# EAGLE board BEP32_6panel_Seed_wMilling (EAGLE 6.5.0), part 1 of 5
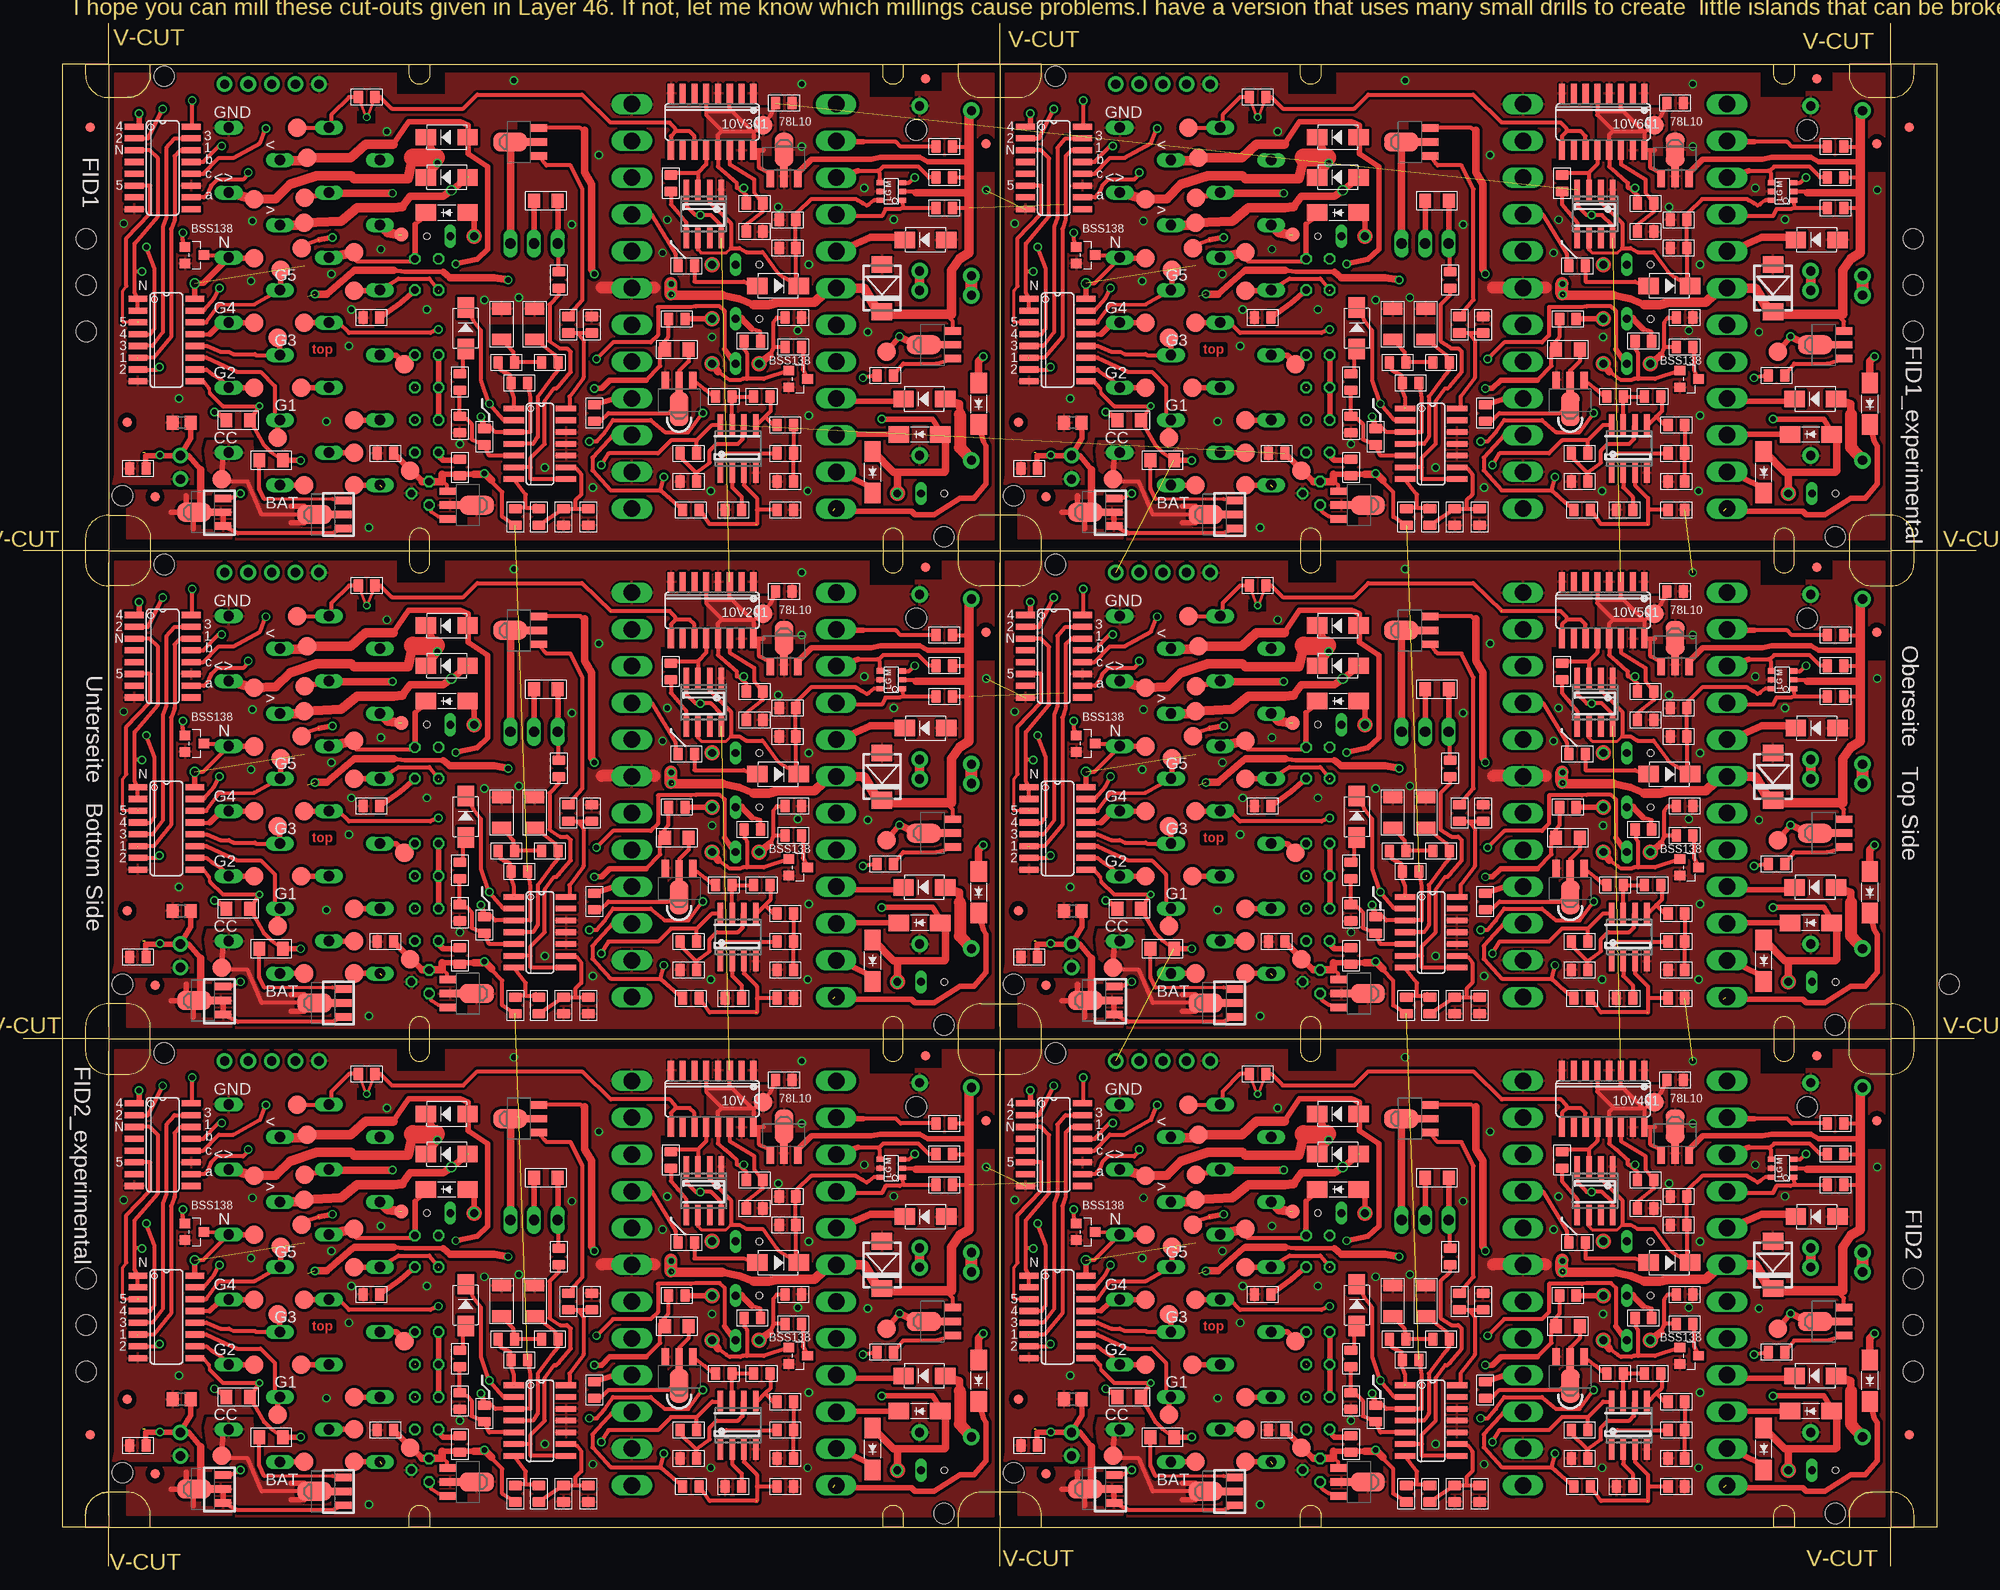
[diagram p0: board, top side]
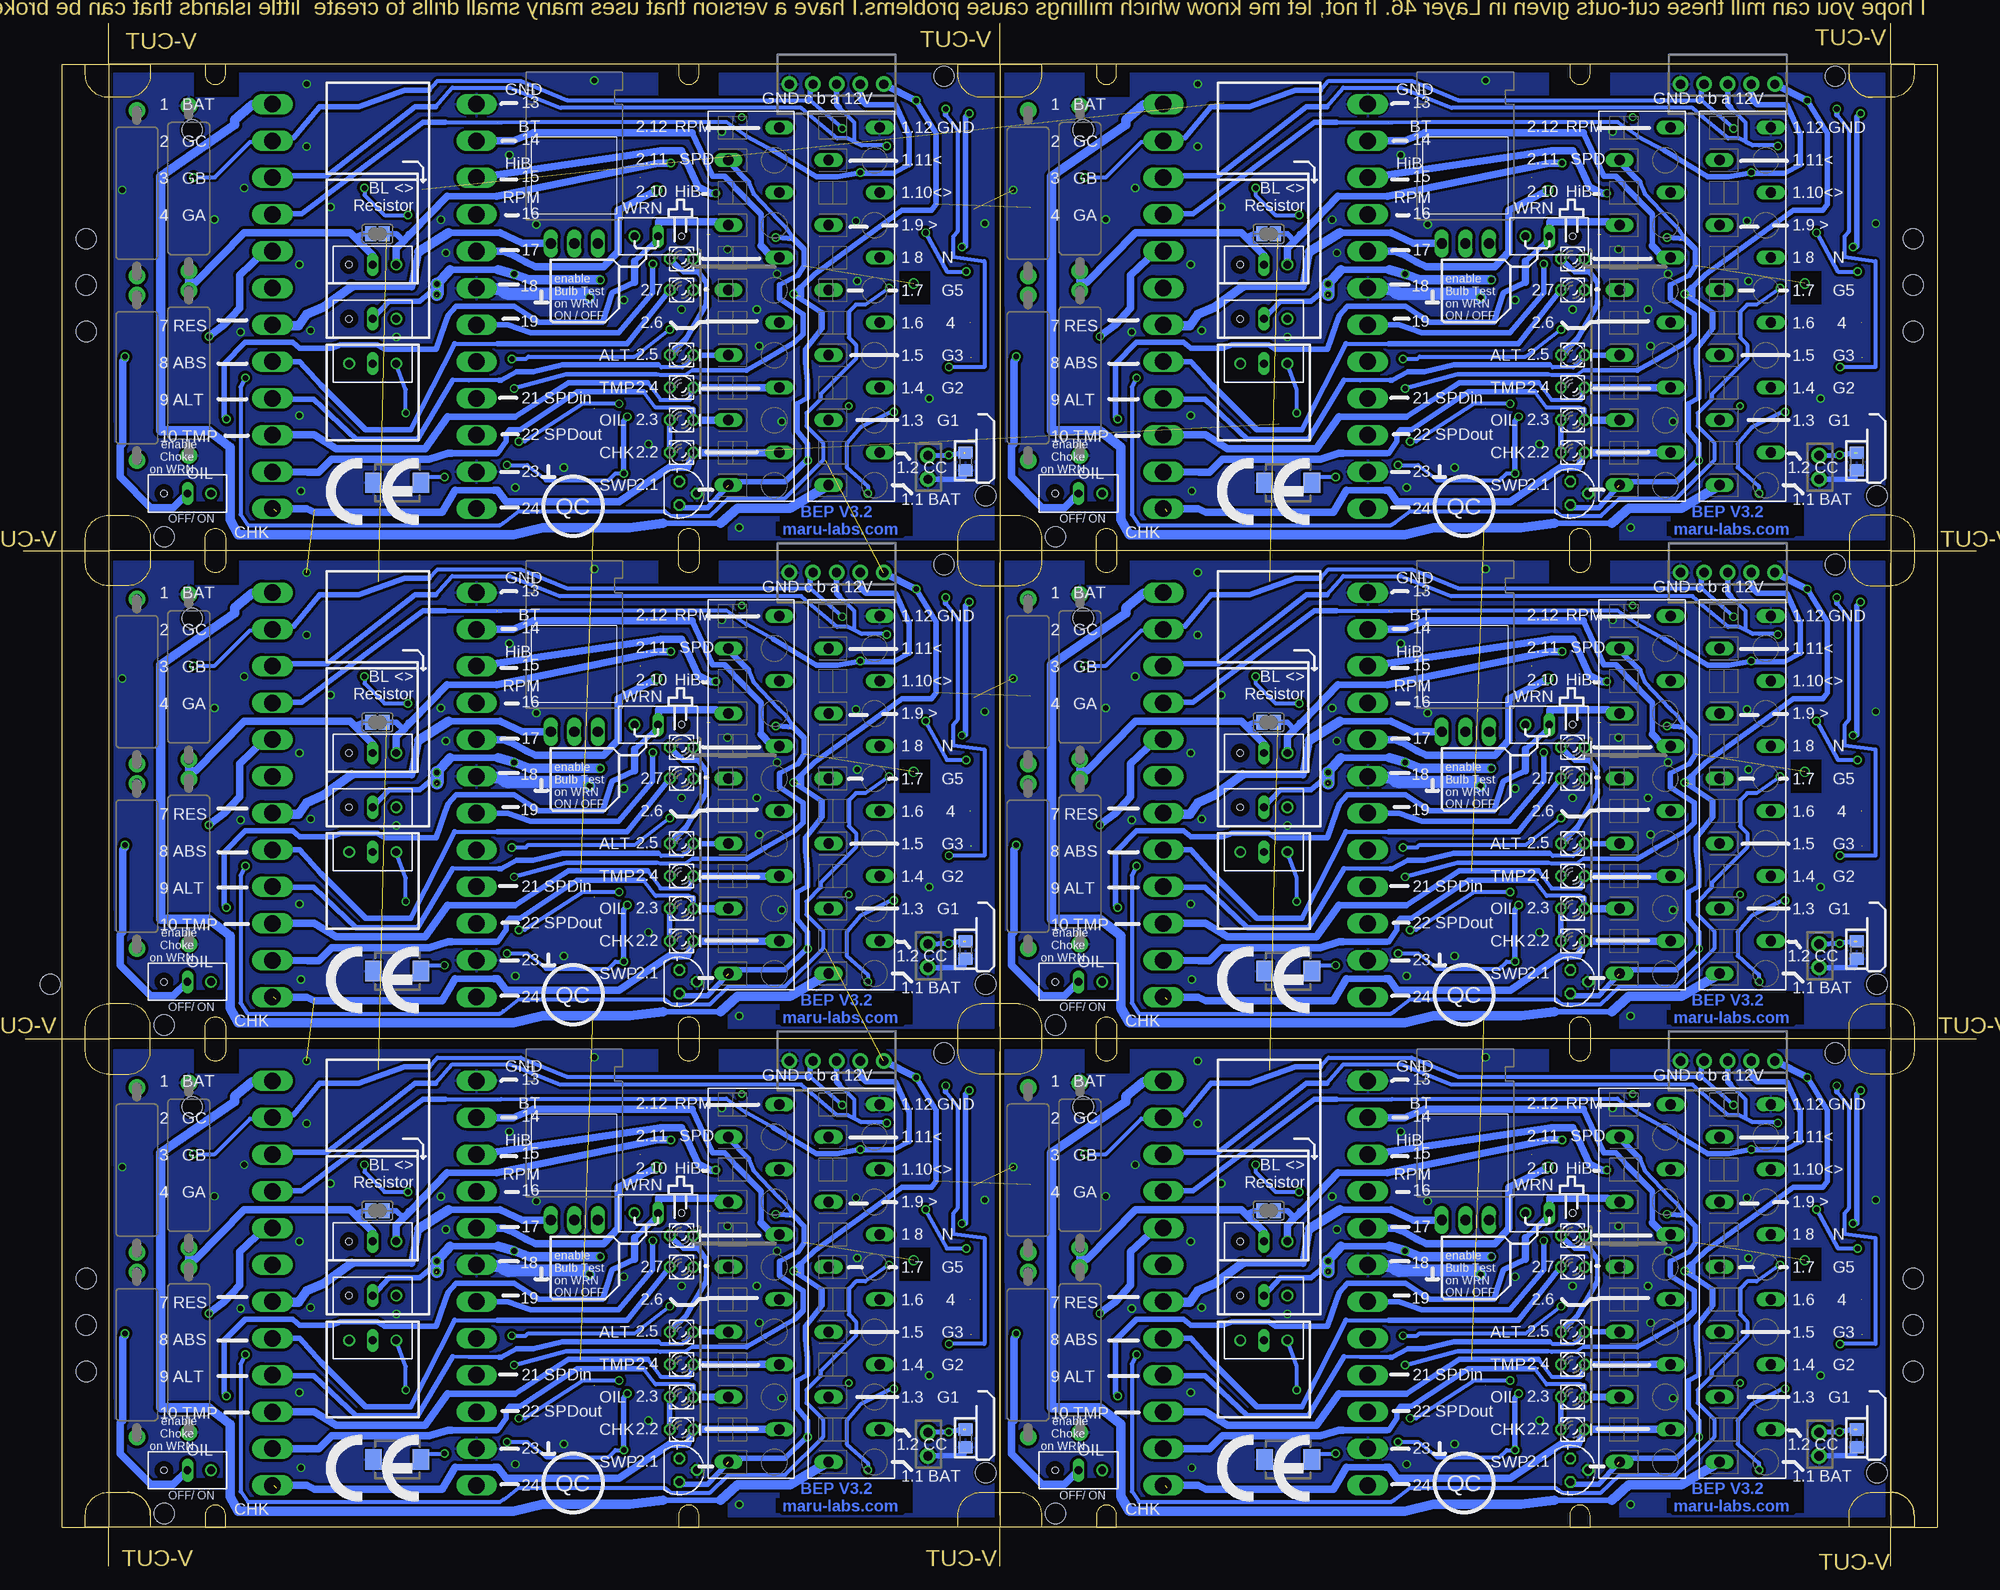
[diagram p1: board, bottom side, seen from below]

Size 210.4 x 166.2 mm. Coordinates in mm from the lower left corner, seen from the top.
Outline: 45 segments
Copper layers (1*16): Top 0.035mm / dielectric 1.5mm / Bottom 0.035mm
Design rules "Vorlage BEP3 und hoeher multi-cb_035um-cu": minimum track width 6mil, minimum drill 12mil, track to track 12mil, track to pad 12mil, pad to pad 6mil, via to via 6mil, smd to smd 6mil, copper to edge 10mil, drill to drill 8mil, minimum pad ring 8mil, minimum via ring 6mil, stop-mask expansion 3mil, vias tented up to drill 0mil, thermal gap 8mil
Holes 2.18 mm at 10.7,10.1 96.2,49.5 10.7,62.7 96.2,102.1 10.7,115.3 96.2,154.7 106.7,10.1 192.2,49.5 106.7,62.7 192.2,102.1 106.7,115.3 192.2,154.7 195.2,5.7 111.2,55.3 99.2,5.7 15.2,55.3 99.2,58.3 195.2,58.3 111.2,107.9 15.2,107.9 99.2,110.9 15.2,160.5 111.2,160.5 195.2,110.9 6.8,143 6.8,21 6.8,26 6.8,138 207.5,62.7 203.6,143 203.6,21 203.6,26 203.6,138 6.8,31 6.8,133 203.6,133 203.6,31
tRestrict: area 50.2,25.2 to 56.7,28.5; area 36,50.2 to 37.9,51.5; area 67.6,20.8 to 69.4,22.8; area 53.3,46.1 to 54.7,50.4; area 46.5,6.9 to 47.8,11.4; area 47.8,10.1 to 50.5,11.3; area 19.2,6.6 to 20.6,10.1; area 79.5,45.4 to 84.2,46.7; area 97.6,26.6 to 99.2,27.8; area 90.3,42.2 to 91.4,42.4; area 102.7,45 to 104.6,47.2; area 95.6,53.7 to 98.9,56.4; 78 more areas
bRestrict: area 18.6,5.8 to 28.8,9.3; area 28.7,5.8 to 33.3,7.3; area 38.5,5.1 to 45,7.3; area 39.5,53.3 to 46,55.7; area 90.8,5.7 to 96.8,9.5; area 16.7,30.7 to 20,34.3; area 91.2,53.1 to 96,56.1; area 18.6,58.4 to 28.8,62; area 28.7,58.4 to 33.3,59.9; area 38.5,57.7 to 45,59.9; area 39.5,105.9 to 46,108.3; area 90.8,58.3 to 96.8,62.1; 30 more areas
Milling: 180 lines

## Footprints (pad centres in the part's own frame; a part is rotated, then mirrored left to right if it is on the bottom)
12-PIN = drill 1.118 long: 1 19.25,-2.45; 2 15.75,3.05; 3 12.25,-2.45; 4 8.75,3.05; 5 5.25,-2.45; 6 1.75,3.05; 7 -1.75,-2.45; 8 -5.25,3.05; 9 -8.75,-2.45; 10 -12.25,3.05; 11 -15.75,-2.45; 12 -19.25,3.05
B2.0 = smd 2 x 2: TP 0,0
C0805 = smd 1.397 x 1.016: 1 0,0.889; 2 0,-0.889
C1206 = smd 1.27 x 2.032: 1 -1.651,0; 2 1.651,0
DO214AA = smd 1.8 x 2.2: A 2.55,0; C -2.55,0
DO-214AC = smd 2.2 x 1.77: 1 -2.242,0; 2 2.242,0
DO214AA_BI = smd 1.8 x 2.2: A 2.45,0; C -2.65,0
DO-214AC_SLIM = smd 2.2 x 1.77: 1 -2.242,0; 2 2.242,0
FIDUCIAL_1MM = smd 1 x 1: 1 0,0
FIDUCIAL_1MM_WITH_SOLDERMASK = smd 1 x 1: 1 0,0
SO08 = smd 0.6 x 2.2: 1 -1.905,-2.6; 2 -0.635,-2.6; 3 0.635,-2.6; 4 1.905,-2.6; 5 1.905,2.6; 6 0.635,2.6; 7 -0.635,2.6; 8 -1.905,2.6
SOT89_ROUND = smd 0.8 x 1.8: 1 -1.499,-2.181; 3 1.499,-2.181 | smd 0.8 x 2.3: 2 0,-1.927 | smd 2.032 x 3.65: 2@1 0,0.94
78LXX = drill 0.813 octagon: GND 0,1.905; IN 1.27,0; OUT -1.27,0
SO16 = smd 0.66 x 2.032: 1 -4.445,-3.073; 2 -3.175,-3.073; 3 -1.905,-3.073; 4 -0.635,-3.073; 5 0.635,-3.073; 6 1.905,-3.073; 7 3.175,-3.073; 8 4.445,-3.073; 9 4.445,3.073; 10 3.175,3.073; 11 1.905,3.073; 12 0.635,3.073; 13 -0.635,3.073; 14 -1.905,3.073; 15 -3.175,3.073; 16 -4.445,3.073
SOT457R_PHILIPS = smd 0.55 x 0.8: 1 -0.95,-1.2; 2 0,-1.2; 3 0.95,-1.2; 4 0.95,1.2; 5 0,1.2; 6 -0.95,1.2
SO14 = smd 0.6 x 2.2: 1 -3.81,-2.8; 2 -2.54,-2.8; 3 -1.27,-2.8; 4 0,-2.8; 5 1.27,-2.8; 6 2.54,-2.8; 7 3.81,-2.8; 8 3.81,2.8; 9 2.54,2.8; 10 1.27,2.8; 11 0,2.8; 12 -1.27,2.8; 13 -2.54,2.8; 14 -3.81,2.8
TO220H_NOHOLE = drill 1.118 long: 1 -2.54,-10.16; 2 0,-10.16; 3 2.54,-10.16
JP2_SMALLPADS = drill 0.85: 1 -2.54,0 | drill 0.85 long: 2 0,0 | hole 0.7: 2.54,0
JP2_ORIG_SMALLPADS = drill 0.85: 1 -2.54,0; 3 2.54,0 | drill 0.85 long: 2 0,0
LD260 = drill 0.813 octagon: A -1.27,0; K 1.27,0
SOT89 = smd 0.8 x 1.8: 1 -1.499,-2.181; 3 1.499,-2.181 | smd 0.8 x 2.3: 2 0,-1.927 | smd 2.032 x 3.65: 2@1 0,0.94
SOT-23 = smd 1.016 x 1.143: 1 -0.889,-1.016; 2 0.889,-1.016; 3 0,1.016
R0805 = smd 1.397 x 1.016: 1 0,0.889; 2 0,-0.889
R1206 = smd 1.27 x 1.524: 1 -1.27,0; 2 1.27,0
R0805' = smd 1.3 x 1.5: 1 -0.95,0; 2 0.95,0
V235/17_1MM = drill 1 pad 1.778: 1 -8.89,0; 2 8.89,0
SJ = smd 1.2 x 1.6: 1 -0.725,0; 2 0.725,0
B1,27 = smd 1.5 x 1.5: TP 0,0
24-PIN_V2 = drill 1.778 long: 1 -21.78,-11; 2 -17.82,-11; 3 -13.86,-11; 4 -9.9,-11; 5 -5.94,-11; 6 -1.98,-11; 7 1.98,-11; 8 5.94,-11; 9 9.9,-11; 10 13.86,-11; 11 17.82,-11; 12 21.78,-11; 13 -21.78,11; 14 -17.82,11; 15 -13.86,11; 16 -9.9,11; 17 -5.94,11; 18 -1.98,11; 19 1.98,11; 20 5.94,11; 21 9.9,11; 22 13.86,11; 23 17.82,11; 24 21.78,11
22-23-2021 = drill 1 pad 1.676: 1 -1.27,0; 2 1.27,0
22-23-2051 = drill 1 pad 1.676: 1 -5.08,0; 2 -2.54,0; 3 0,0; 4 2.54,0; 5 5.08,0

## Placement (x,y rotation side)
1  [12-PIN]  25.19,30.5 270 bottom
2  [12-PIN]  35.98,30.5 270 bottom
3  [12-PIN]  25.19,83.1 270 bottom
4  [12-PIN]  35.98,83.1 270 bottom
5  [12-PIN]  25.19,135.7 270 bottom
6  [12-PIN]  35.98,135.7 270 bottom
6V  TPSB2.0  [B2.0]  41.7,12.78 0 top
6V201  TPSB2.0  [B2.0]  41.7,65.38 0 top
6V301  TPSB2.0  [B2.0]  41.7,117.98 0 top
6V401  TPSB2.0  [B2.0]  137.7,12.78 0 top
6V501  TPSB2.0  [B2.0]  137.7,65.38 0 top
6V601  TPSB2.0  [B2.0]  137.7,117.98 0 top
10V  TPSB2.0  [B2.0]  79.7,50 0 top
10V201  TPSB2.0  [B2.0]  79.7,102.6 0 top
10V301  TPSB2.0  [B2.0]  79.7,155.2 0 top
10V401  TPSB2.0  [B2.0]  175.7,50 0 top
10V501  TPSB2.0  [B2.0]  175.7,102.6 0 top
10V601  TPSB2.0  [B2.0]  175.7,155.2 0 top
13  [12-PIN]  121.19,30.5 270 bottom
14  [12-PIN]  131.98,30.5 270 bottom
15  [12-PIN]  121.19,83.1 270 bottom
16  [12-PIN]  131.98,83.1 270 bottom
17  [12-PIN]  121.19,135.7 270 bottom
18  [12-PIN]  131.98,135.7 270 bottom
C101  4.7u  [C0805]  82.09,8.59 90 top
C102  100nF  [C0805]  81.96,52.4 90 top
C103  100nF,  [C0805]  82.09,11.64 270 top
C104  100nF,  [C0805]  39.03,14.68 270 top
C105  100nF.  [C0805]  58.21,7.83 0 top
C106  100nF.  [C0805]  61.26,28.53 0 top
C107  100u  [C1206]  51.54,28.59 90 top
C108  100u  [C1206]  55.1,28.59 90 top
C109  2.2nF  [C0805]  82.34,36.78 90 top
C110  100nF  [C0805]  78.78,38.56 90 top
C201  4.7u  [C0805]  82.09,61.19 90 top
C202  100nF  [C0805]  81.96,105 90 top
C203  100nF,  [C0805]  82.09,64.24 270 top
C204  100nF,  [C0805]  39.03,67.28 270 top
C205  100nF.  [C0805]  58.21,60.43 0 top
C206  100nF.  [C0805]  61.26,81.13 0 top
C207  100u  [C1206]  51.54,81.19 90 top
C208  100u  [C1206]  55.1,81.19 90 top
C209  2.2nF  [C0805]  82.34,89.38 90 top
C210  100nF  [C0805]  78.78,91.16 90 top
C301  4.7u  [C0805]  82.09,113.79 90 top
C302  100nF  [C0805]  81.96,157.6 90 top
C303  100nF,  [C0805]  82.09,116.84 270 top
C304  100nF,  [C0805]  39.03,119.88 270 top
C305  100nF.  [C0805]  58.21,113.03 0 top
C306  100nF.  [C0805]  61.26,133.73 0 top
C307  100u  [C1206]  51.54,133.79 90 top
C308  100u  [C1206]  55.1,133.79 90 top
C309  2.2nF  [C0805]  82.34,141.98 90 top
C310  100nF  [C0805]  78.78,143.76 90 top
C401  4.7u  [C0805]  178.09,8.59 90 top
C402  100nF  [C0805]  177.96,52.4 90 top
C403  100nF,  [C0805]  178.09,11.64 270 top
C404  100nF,  [C0805]  135.03,14.68 270 top
C405  100nF.  [C0805]  154.21,7.83 0 top
C406  100nF.  [C0805]  157.26,28.53 0 top
C407  100u  [C1206]  147.54,28.59 90 top
C408  100u  [C1206]  151.1,28.59 90 top
C409  2.2nF  [C0805]  178.34,36.78 90 top
C410  100nF  [C0805]  174.78,38.56 90 top
C501  4.7u  [C0805]  178.09,61.19 90 top
C502  100nF  [C0805]  177.96,105 90 top
C503  100nF,  [C0805]  178.09,64.24 270 top
C504  100nF,  [C0805]  135.03,67.28 270 top
C505  100nF.  [C0805]  154.21,60.43 0 top
C506  100nF.  [C0805]  157.26,81.13 0 top
C507  100u  [C1206]  147.54,81.19 90 top
C508  100u  [C1206]  151.1,81.19 90 top
C509  2.2nF  [C0805]  178.34,89.38 90 top
C510  100nF  [C0805]  174.78,91.16 90 top
C601  4.7u  [C0805]  178.09,113.79 90 top
C602  100nF  [C0805]  177.96,157.6 90 top
C603  100nF,  [C0805]  178.09,116.84 270 top
C604  100nF,  [C0805]  135.03,119.88 270 top
C605  100nF.  [C0805]  154.21,113.03 0 top
C606  100nF.  [C0805]  157.26,133.73 0 top
C607  100u  [C1206]  147.54,133.79 90 top
C608  100u  [C1206]  151.1,133.79 90 top
C609  2.2nF  [C0805]  178.34,141.98 90 top
C610  100nF  [C0805]  174.78,143.76 90 top
D101  SM6T  [DO214AA]  92.5,32.46 90 top
D102  1N4007,  [DO-214AC]  45.64,44.4 180 top
D103  1N4007,  [DO-214AC]  45.64,48.72 180 top
D104  SM6TDO214AA_BI  [DO214AA_BI]  74.21,11.51 180 bottom
D105  1N4007.  [DO-214AC]  97.2,37.67 180 top
D106  1N4007.  [DO-214AC]  97.07,20.53 180 top
D107  1N5817  [DO-214AC_SLIM]  96.56,16.72 180 top
D108  1N5817.  [DO-214AC_SLIM]  91.5,12.64 270 top
D109  1N5817.  [DO-214AC_SLIM]  102.93,20.01 270 top
D110  1N5817  [DO-214AC_SLIM]  45.64,40.59 180 top
D111  1N4007  [DO-214AC]  47.67,28.15 90 top
D112  1N4007  [DO-214AC]  81.32,32.72 0 top
D201  SM6T  [DO214AA]  92.5,85.06 90 top
D202  1N4007,  [DO-214AC]  45.64,97 180 top
D203  1N4007,  [DO-214AC]  45.64,101.32 180 top
D204  SM6TDO214AA_BI  [DO214AA_BI]  74.21,64.11 180 bottom
D205  1N4007.  [DO-214AC]  97.2,90.27 180 top
D206  1N4007.  [DO-214AC]  97.07,73.13 180 top
D207  1N5817  [DO-214AC_SLIM]  96.56,69.32 180 top
D208  1N5817.  [DO-214AC_SLIM]  91.5,65.24 270 top
D209  1N5817.  [DO-214AC_SLIM]  102.93,72.61 270 top
D210  1N5817  [DO-214AC_SLIM]  45.64,93.19 180 top
D211  1N4007  [DO-214AC]  47.67,80.75 90 top
D212  1N4007  [DO-214AC]  81.32,85.32 0 top
D301  SM6T  [DO214AA]  92.5,137.66 90 top
D302  1N4007,  [DO-214AC]  45.64,149.6 180 top
D303  1N4007,  [DO-214AC]  45.64,153.92 180 top
D304  SM6TDO214AA_BI  [DO214AA_BI]  74.21,116.71 180 bottom
D305  1N4007.  [DO-214AC]  97.2,142.87 180 top
D306  1N4007.  [DO-214AC]  97.07,125.73 180 top
D307  1N5817  [DO-214AC_SLIM]  96.56,121.92 180 top
D308  1N5817.  [DO-214AC_SLIM]  91.5,117.84 270 top
D309  1N5817.  [DO-214AC_SLIM]  102.93,125.21 270 top
D310  1N5817  [DO-214AC_SLIM]  45.64,145.79 180 top
D311  1N4007  [DO-214AC]  47.67,133.35 90 top
D312  1N4007  [DO-214AC]  81.32,137.92 0 top
D401  SM6T  [DO214AA]  188.5,32.46 90 top
D402  1N4007,  [DO-214AC]  141.64,44.4 180 top
D403  1N4007,  [DO-214AC]  141.64,48.72 180 top
D404  SM6TDO214AA_BI  [DO214AA_BI]  170.21,11.51 180 bottom
D405  1N4007.  [DO-214AC]  193.2,37.67 180 top
D406  1N4007.  [DO-214AC]  193.07,20.53 180 top
D407  1N5817  [DO-214AC_SLIM]  192.56,16.72 180 top
D408  1N5817.  [DO-214AC_SLIM]  187.5,12.64 270 top
D409  1N5817.  [DO-214AC_SLIM]  198.93,20.01 270 top
D410  1N5817  [DO-214AC_SLIM]  141.64,40.59 180 top
D411  1N4007  [DO-214AC]  143.67,28.15 90 top
D412  1N4007  [DO-214AC]  177.32,32.72 0 top
D501  SM6T  [DO214AA]  188.5,85.06 90 top
D502  1N4007,  [DO-214AC]  141.64,97 180 top
D503  1N4007,  [DO-214AC]  141.64,101.32 180 top
D504  SM6TDO214AA_BI  [DO214AA_BI]  170.21,64.11 180 bottom
D505  1N4007.  [DO-214AC]  193.2,90.27 180 top
D506  1N4007.  [DO-214AC]  193.07,73.13 180 top
D507  1N5817  [DO-214AC_SLIM]  192.56,69.32 180 top
D508  1N5817.  [DO-214AC_SLIM]  187.5,65.24 270 top
D509  1N5817.  [DO-214AC_SLIM]  198.93,72.61 270 top
D510  1N5817  [DO-214AC_SLIM]  141.64,93.19 180 top
D511  1N4007  [DO-214AC]  143.67,80.75 90 top
D512  1N4007  [DO-214AC]  177.32,85.32 0 top
D601  SM6T  [DO214AA]  188.5,137.66 90 top
D602  1N4007,  [DO-214AC]  141.64,149.6 180 top
D603  1N4007,  [DO-214AC]  141.64,153.92 180 top
D604  SM6TDO214AA_BI  [DO214AA_BI]  170.21,116.71 180 bottom
D605  1N4007.  [DO-214AC]  193.2,142.87 180 top
D606  1N4007.  [DO-214AC]  193.07,125.73 180 top
D607  1N5817  [DO-214AC_SLIM]  192.56,121.92 180 top
D608  1N5817.  [DO-214AC_SLIM]  187.5,117.84 270 top
D609  1N5817.  [DO-214AC_SLIM]  198.93,125.21 270 top
D610  1N5817  [DO-214AC_SLIM]  141.64,145.79 180 top
D611  1N4007  [DO-214AC]  143.67,133.35 90 top
D612  1N4007  [DO-214AC]  177.32,137.92 0 top
FID1  FIDUCIAL  [FIDUCIAL_1MM]  7.2,155 0 top
FID1B  FIDUCIALFIDUCIAL_1MM_WITH_SOLDERMASK  [FIDUCIAL_1MM_WITH_SOLDERMASK]  203.2,155 0 top
FID2  FIDUCIAL  [FIDUCIAL_1MM]  203.2,14.2 0 top
FID2B  FIDUCIALFIDUCIAL_1MM_WITH_SOLDERMASK  [FIDUCIAL_1MM_WITH_SOLDERMASK]  7.2,14.2 0 top
FID101  FIDUCIAL  [FIDUCIAL_1MM]  97.2,55 0 top
FID102  FIDUCIAL  [FIDUCIAL_1MM]  11.2,18 0 top
FID103  FIDUCIAL  [FIDUCIAL_1MM]  14.2,10 0 top
FID104  FIDUCIAL  [FIDUCIAL_1MM]  103.7,48 0 top
FID201  FIDUCIAL  [FIDUCIAL_1MM]  97.2,107.6 0 top
FID202  FIDUCIAL  [FIDUCIAL_1MM]  11.2,70.6 0 top
FID203  FIDUCIAL  [FIDUCIAL_1MM]  14.2,62.6 0 top
FID204  FIDUCIAL  [FIDUCIAL_1MM]  103.7,100.6 0 top
FID301  FIDUCIAL  [FIDUCIAL_1MM]  97.2,160.2 0 top
FID302  FIDUCIAL  [FIDUCIAL_1MM]  11.2,123.2 0 top
FID303  FIDUCIAL  [FIDUCIAL_1MM]  14.2,115.2 0 top
FID304  FIDUCIAL  [FIDUCIAL_1MM]  103.7,153.2 0 top
FID401  FIDUCIAL  [FIDUCIAL_1MM]  193.2,55 0 top
FID402  FIDUCIAL  [FIDUCIAL_1MM]  107.2,18 0 top
FID403  FIDUCIAL  [FIDUCIAL_1MM]  110.2,10 0 top
FID404  FIDUCIAL  [FIDUCIAL_1MM]  199.7,48 0 top
FID501  FIDUCIAL  [FIDUCIAL_1MM]  193.2,107.6 0 top
FID502  FIDUCIAL  [FIDUCIAL_1MM]  107.2,70.6 0 top
FID503  FIDUCIAL  [FIDUCIAL_1MM]  110.2,62.6 0 top
FID504  FIDUCIAL  [FIDUCIAL_1MM]  199.7,100.6 0 top
FID601  FIDUCIAL  [FIDUCIAL_1MM]  193.2,160.2 0 top
FID602  FIDUCIAL  [FIDUCIAL_1MM]  107.2,123.2 0 top
FID603  FIDUCIAL  [FIDUCIAL_1MM]  110.2,115.2 0 top
FID604  FIDUCIAL  [FIDUCIAL_1MM]  199.7,153.2 0 top
IC101  LM2904  [SO08]  77.01,15.19 0 top
IC102  78L06  [SOT89_ROUND]  47.92,9.1 270 top
IC103  6V pos  [78LXX]  43.73,10.37 270 bottom
IC104  78L10  [SOT89_ROUND]  81.96,46.43 0 top
IC105  4028  [SO16]  15.03,45.42 270 top
IC106  NUP4304SOT457_R  [SOT457R_PHILIPS]  93.52,42.88 90 top
IC107  ULN2004  [SO16]  15.43,26.88 270 top
IC108  LM339  [SO14]  55.67,15.7 270 top
IC109  317TO202H_NOHOLE  [TO220H_NOHOLE]  55.03,47.45 0 bottom
IC110  555  [SO08]  73.32,40.47 180 top
IC111  4538  [SO16]  74.21,50.37 180 top
IC201  LM2904  [SO08]  77.01,67.79 0 top
IC202  78L06  [SOT89_ROUND]  47.92,61.7 270 top
IC203  6V pos  [78LXX]  43.73,62.97 270 bottom
IC204  78L10  [SOT89_ROUND]  81.96,99.03 0 top
IC205  4028  [SO16]  15.03,98.02 270 top
IC206  NUP4304SOT457_R  [SOT457R_PHILIPS]  93.52,95.48 90 top
IC207  ULN2004  [SO16]  15.43,79.48 270 top
IC208  LM339  [SO14]  55.67,68.3 270 top
IC209  317TO202H_NOHOLE  [TO220H_NOHOLE]  55.03,100.05 0 bottom
IC210  555  [SO08]  73.32,93.06 180 top
IC211  4538  [SO16]  74.21,102.97 180 top
IC301  LM2904  [SO08]  77.01,120.39 0 top
IC302  78L06  [SOT89_ROUND]  47.92,114.3 270 top
IC303  6V pos  [78LXX]  43.73,115.57 270 bottom
IC304  78L10  [SOT89_ROUND]  81.96,151.63 0 top
IC305  4028  [SO16]  15.03,150.62 270 top
IC306  NUP4304SOT457_R  [SOT457R_PHILIPS]  93.52,148.08 90 top
IC307  ULN2004  [SO16]  15.43,132.08 270 top
IC308  LM339  [SO14]  55.67,120.9 270 top
IC309  317TO202H_NOHOLE  [TO220H_NOHOLE]  55.03,152.65 0 bottom
IC310  555  [SO08]  73.32,145.66 180 top
IC311  4538  [SO16]  74.21,155.57 180 top
IC401  LM2904  [SO08]  173.01,15.19 0 top
IC402  78L06  [SOT89_ROUND]  143.92,9.1 270 top
IC403  6V pos  [78LXX]  139.73,10.37 270 bottom
IC404  78L10  [SOT89_ROUND]  177.96,46.43 0 top
IC405  4028  [SO16]  111.03,45.42 270 top
IC406  NUP4304SOT457_R  [SOT457R_PHILIPS]  189.52,42.88 90 top
IC407  ULN2004  [SO16]  111.43,26.88 270 top
IC408  LM339  [SO14]  151.67,15.7 270 top
IC409  317TO202H_NOHOLE  [TO220H_NOHOLE]  151.03,47.45 0 bottom
IC410  555  [SO08]  169.32,40.47 180 top
IC411  4538  [SO16]  170.21,50.37 180 top
IC501  LM2904  [SO08]  173.01,67.79 0 top
IC502  78L06  [SOT89_ROUND]  143.92,61.7 270 top
IC503  6V pos  [78LXX]  139.73,62.97 270 bottom
IC504  78L10  [SOT89_ROUND]  177.96,99.03 0 top
IC505  4028  [SO16]  111.03,98.02 270 top
IC506  NUP4304SOT457_R  [SOT457R_PHILIPS]  189.52,95.48 90 top
IC507  ULN2004  [SO16]  111.43,79.48 270 top
IC508  LM339  [SO14]  151.67,68.3 270 top
IC509  317TO202H_NOHOLE  [TO220H_NOHOLE]  151.03,100.05 0 bottom
IC510  555  [SO08]  169.32,93.06 180 top
IC511  4538  [SO16]  170.21,102.97 180 top
IC601  LM2904  [SO08]  173.01,120.39 0 top
IC602  78L06  [SOT89_ROUND]  143.92,114.3 270 top
IC603  6V pos  [78LXX]  139.73,115.57 270 bottom
IC604  78L10  [SOT89_ROUND]  177.96,151.63 0 top
IC605  4028  [SO16]  111.03,150.62 270 top
IC606  NUP4304SOT457_R  [SOT457R_PHILIPS]  189.52,148.08 90 top
IC607  ULN2004  [SO16]  111.43,132.08 270 top
IC608  LM339  [SO14]  151.67,120.9 270 top
IC609  317TO202H_NOHOLE  [TO220H_NOHOLE]  151.03,152.65 0 bottom
IC610  555  [SO08]  169.32,145.66 180 top
IC611  4538  [SO16]  170.21,155.57 180 top
JP101  [JP2_SMALLPADS]  76.75,29.16 180 bottom
JP102  [JP2_SMALLPADS]  96.7,10.35 180 bottom
JP103  [JP2_SMALLPADS]  46.02,38.05 0 bottom
JP104  [JP2_SMALLPADS]  76.75,35 180 bottom
JP105  JP2E_ORIG  [JP2_ORIG_SMALLPADS]  76.75,24.34 180 bottom
JP201  [JP2_SMALLPADS]  76.75,81.76 180 bottom
JP202  [JP2_SMALLPADS]  96.7,62.95 180 bottom
JP203  [JP2_SMALLPADS]  46.02,90.65 0 bottom
JP204  [JP2_SMALLPADS]  76.75,87.6 180 bottom
JP205  JP2E_ORIG  [JP2_ORIG_SMALLPADS]  76.75,76.94 180 bottom
JP301  [JP2_SMALLPADS]  76.75,134.36 180 bottom
JP302  [JP2_SMALLPADS]  96.7,115.55 180 bottom
JP303  [JP2_SMALLPADS]  46.02,143.25 0 bottom
JP304  [JP2_SMALLPADS]  76.75,140.2 180 bottom
JP305  JP2E_ORIG  [JP2_ORIG_SMALLPADS]  76.75,129.54 180 bottom
JP401  [JP2_SMALLPADS]  172.75,29.16 180 bottom
JP402  [JP2_SMALLPADS]  192.7,10.35 180 bottom
JP403  [JP2_SMALLPADS]  142.02,38.05 0 bottom
JP404  [JP2_SMALLPADS]  172.75,35 180 bottom
JP405  JP2E_ORIG  [JP2_ORIG_SMALLPADS]  172.75,24.34 180 bottom
JP501  [JP2_SMALLPADS]  172.75,81.76 180 bottom
JP502  [JP2_SMALLPADS]  192.7,62.95 180 bottom
JP503  [JP2_SMALLPADS]  142.02,90.65 0 bottom
JP504  [JP2_SMALLPADS]  172.75,87.6 180 bottom
JP505  JP2E_ORIG  [JP2_ORIG_SMALLPADS]  172.75,76.94 180 bottom
JP601  [JP2_SMALLPADS]  172.75,134.36 180 bottom
JP602  [JP2_SMALLPADS]  192.7,115.55 180 bottom
JP603  [JP2_SMALLPADS]  142.02,143.25 0 bottom
JP604  [JP2_SMALLPADS]  172.75,140.2 180 bottom
JP605  JP2E_ORIG  [JP2_ORIG_SMALLPADS]  172.75,129.54 180 bottom
LED101  [LD260]  43.48,32.25 0 bottom
LED102  [LD260]  43.48,14.75 0 bottom
LED103  [LD260]  43.48,18.25 0 bottom
LED104  [LD260]  43.48,21.75 0 bottom
LED105  [LD260]  43.48,25.25 0 bottom
LED106  [LD260]  43.48,35.62 0 bottom
LED201  [LD260]  43.48,84.85 0 bottom
LED202  [LD260]  43.48,67.35 0 bottom
LED203  [LD260]  43.48,70.85 0 bottom
LED204  [LD260]  43.48,74.35 0 bottom
LED205  [LD260]  43.48,77.85 0 bottom
LED206  [LD260]  43.48,88.22 0 bottom
LED301  [LD260]  43.48,137.45 0 bottom
LED302  [LD260]  43.48,119.95 0 bottom
LED303  [LD260]  43.48,123.45 0 bottom
LED304  [LD260]  43.48,126.95 0 bottom
LED305  [LD260]  43.48,130.45 0 bottom
LED306  [LD260]  43.48,140.82 0 bottom
LED401  [LD260]  139.48,32.25 0 bottom
LED402  [LD260]  139.48,14.75 0 bottom
LED403  [LD260]  139.48,18.25 0 bottom
LED404  [LD260]  139.48,21.75 0 bottom
LED405  [LD260]  139.48,25.25 0 bottom
LED406  [LD260]  139.48,35.62 0 bottom
LED501  [LD260]  139.48,84.85 0 bottom
LED502  [LD260]  139.48,67.35 0 bottom
LED503  [LD260]  139.48,70.85 0 bottom
LED504  [LD260]  139.48,74.35 0 bottom
LED505  [LD260]  139.48,77.85 0 bottom
LED506  [LD260]  139.48,88.22 0 bottom
LED601  [LD260]  139.48,137.45 0 bottom
LED602  [LD260]  139.48,119.95 0 bottom
LED603  [LD260]  139.48,123.45 0 bottom
LED604  [LD260]  139.48,126.95 0 bottom
LED605  [LD260]  139.48,130.45 0 bottom
LED606  [LD260]  139.48,140.82 0 bottom
Q101  BA.  [SOT89]  32.3,8.08 90 top
Q102  BA.  [SOT89]  19.35,8.33 90 top
Q103  MY  [SOT89]  70.66,20.4 180 top
Q104  BA  [SOT89]  97.96,26.37 90 top
Q105  BA  [SOT89]  53.38,48.21 90 top
Q106  J1  [SOT-23]  18.46,36.02 270 top
Q107  J1  [SOT-23]  83.48,22.68 270 top
Q201  BA.  [SOT89]  32.3,60.68 90 top
Q202  BA.  [SOT89]  19.35,60.93 90 top
Q203  MY  [SOT89]  70.66,73 180 top
Q204  BA  [SOT89]  97.96,78.97 90 top
Q205  BA  [SOT89]  53.38,100.81 90 top
Q206  J1  [SOT-23]  18.46,88.62 270 top
Q207  J1  [SOT-23]  83.48,75.28 270 top
Q301  BA.  [SOT89]  32.3,113.28 90 top
Q302  BA.  [SOT89]  19.35,113.53 90 top
Q303  MY  [SOT89]  70.66,125.6 180 top
Q304  BA  [SOT89]  97.96,131.57 90 top
Q305  BA  [SOT89]  53.38,153.41 90 top
Q306  J1  [SOT-23]  18.46,141.22 270 top
Q307  J1  [SOT-23]  83.48,127.89 270 top
Q401  BA.  [SOT89]  128.3,8.08 90 top
Q402  BA.  [SOT89]  115.35,8.33 90 top
Q403  MY  [SOT89]  166.66,20.4 180 top
Q404  BA  [SOT89]  193.96,26.37 90 top
Q405  BA  [SOT89]  149.38,48.21 90 top
Q406  J1  [SOT-23]  114.46,36.02 270 top
Q407  J1  [SOT-23]  179.48,22.68 270 top
Q501  BA.  [SOT89]  128.3,60.68 90 top
Q502  BA.  [SOT89]  115.35,60.93 90 top
Q503  MY  [SOT89]  166.66,73 180 top
Q504  BA  [SOT89]  193.96,78.97 90 top
Q505  BA  [SOT89]  149.38,100.81 90 top
Q506  J1  [SOT-23]  114.46,88.62 270 top
Q507  J1  [SOT-23]  179.48,75.28 270 top
Q601  BA.  [SOT89]  128.3,113.28 90 top
Q602  BA.  [SOT89]  115.35,113.53 90 top
Q603  MY  [SOT89]  166.66,125.6 180 top
Q604  BA  [SOT89]  193.96,131.57 90 top
Q605  BA  [SOT89]  149.38,153.41 90 top
Q606  J1  [SOT-23]  114.46,141.22 270 top
Q607  J1  [SOT-23]  179.48,127.89 270 top
R101  102  [R0805]  12.36,13.03 270 top
R102  13  [R1206]  26.71,13.92 180 top
R103  R_user  [R0805']  17.07,17.99 180 top
R104  R_user  [R0805']  12.87,13.79 270 bottom
R105  4701  [R0805]  71.93,8.59 270 top
R106  13  [R1206]  23.16,18.24 180 top
R107  1002  [R0805]  76.5,8.59 90 top
R108  1002  [R0805]  82.09,14.68 270 top
R109  104  [R0805]  99.23,47.7 90 top
R110  104  [R0805]  99.23,44.4 90 top
R111  104  [R0805]  99.23,41.1 90 top
R112  102  [R0805]  82.09,17.73 270 top
R113  102  [R0805]  71.67,14.68 90 top
R114  102  [R0805]  71.67,11.64 90 top
R115  100  [R0805]  61.51,19 0 top
R116  4701  [R0805]  75.48,20.78 270 top
R117  2702  [R0805]  79.55,20.78 90 top
R118  13  [R1206]  70.41,25.86 180 top
R119  2201  [R0805]  70.4,29.16 90 top
R120  1002  [R0805]  57.7,33.35 180 top
R121  1502  [R0805]  53,7.83 0 top
R122  2702  [R0805]  55.54,7.83 0 top
R123  2702  [R0805]  60.88,7.83 180 top
R124  1002  [R0805]  53.45,22.24 270 top
R125  104  [R0805]  52.05,24.46 270 top
R126  4701  [R0805]  58.72,28.53 0 top
R127  47  [V235/17_1MM]  102.15,22.81 90 bottom
R128  102  [R0805]  92.88,23.07 90 top
R129  47  [V235/17_1MM]  102.15,42.69 90 bottom
R130  104  [R0805]  56.75,24.46 270 top
R131  1502  [R0805]  49.7,16.46 180 top
R132  1002  [R0805]  47.03,17.8 180 top
R133  2201  [R0805]  47.03,22.37 0 top
R134  13  [R1206]  56.3,41.86 180 top
R135  104  [R0805]  78.53,26.75 270 top
R136  47  [V235/17_1MM]  96.56,23.32 90 bottom
R137  47  [V235/17_1MM]  96.56,43.2 270 bottom
R138  100  [R0805]  82.98,26.11 90 top
R139  (101)  [R0805]  82.98,29.29 90 top
R140  2702  [R0805]  71.42,34.88 270 top
R141  104  [R0805]  82.34,39.83 270 top
R142  (1000)  [R0805]  47.03,13.16 0 top
R143  (101)  [R0805]  37.51,29.29 270 top
R144  (1002)  [R0805]  69.77,43.77 0 top
R145  2702  [R0805]  78.78,41.61 270 top
R146  (1002)  [R0805]  37,53.04 90 top
R201  102  [R0805]  12.36,65.63 270 top
R202  13  [R1206]  26.71,66.52 180 top
R203  R_user  [R0805']  17.07,70.59 180 top
R204  R_user  [R0805']  12.87,66.4 270 bottom
R205  4701  [R0805]  71.93,61.19 270 top
R206  13  [R1206]  23.16,70.84 180 top
R207  1002  [R0805]  76.5,61.19 90 top
R208  1002  [R0805]  82.09,67.28 270 top
R209  104  [R0805]  99.23,100.3 90 top
R210  104  [R0805]  99.23,97 90 top
R211  104  [R0805]  99.23,93.7 90 top
R212  102  [R0805]  82.09,70.33 270 top
R213  102  [R0805]  71.67,67.28 90 top
R214  102  [R0805]  71.67,64.24 90 top
R215  100  [R0805]  61.51,71.6 0 top
R216  4701  [R0805]  75.48,73.38 270 top
R217  2702  [R0805]  79.55,73.38 90 top
R218  13  [R1206]  70.41,78.46 180 top
R219  2201  [R0805]  70.4,81.76 90 top
R220  1002  [R0805]  57.7,85.95 180 top
R221  1502  [R0805]  53,60.43 0 top
R222  2702  [R0805]  55.54,60.43 0 top
R223  2702  [R0805]  60.88,60.43 180 top
R224  1002  [R0805]  53.45,74.84 270 top
R225  104  [R0805]  52.05,77.06 270 top
R226  4701  [R0805]  58.72,81.13 0 top
R227  47  [V235/17_1MM]  102.15,75.41 90 bottom
R228  102  [R0805]  92.88,75.67 90 top
R229  47  [V235/17_1MM]  102.15,95.29 90 bottom
R230  104  [R0805]  56.75,77.06 270 top
R231  1502  [R0805]  49.7,69.06 180 top
R232  1002  [R0805]  47.03,70.4 180 top
R233  2201  [R0805]  47.03,74.97 0 top
R234  13  [R1206]  56.3,94.46 180 top
R235  104  [R0805]  78.53,79.35 270 top
R236  47  [V235/17_1MM]  96.56,75.92 90 bottom
R237  47  [V235/17_1MM]  96.56,95.8 270 bottom
R238  100  [R0805]  82.98,78.71 90 top
R239  (101)  [R0805]  82.98,81.89 90 top
R240  2702  [R0805]  71.42,87.48 270 top
R241  104  [R0805]  82.34,92.43 270 top
R242  (1000)  [R0805]  47.03,65.76 0 top
R243  (101)  [R0805]  37.51,81.89 270 top
R244  (1002)  [R0805]  69.77,96.37 0 top
R245  2702  [R0805]  78.78,94.21 270 top
R246  (1002)  [R0805]  37,105.64 90 top
R301  102  [R0805]  12.36,118.23 270 top
R302  13  [R1206]  26.71,119.12 180 top
R303  R_user  [R0805']  17.07,123.19 180 top
R304  R_user  [R0805']  12.87,119 270 bottom
R305  4701  [R0805]  71.93,113.79 270 top
R306  13  [R1206]  23.16,123.44 180 top
R307  1002  [R0805]  76.5,113.79 90 top
R308  1002  [R0805]  82.09,119.88 270 top
R309  104  [R0805]  99.23,152.9 90 top
R310  104  [R0805]  99.23,149.6 90 top
R311  104  [R0805]  99.23,146.3 90 top
R312  102  [R0805]  82.09,122.93 270 top
R313  102  [R0805]  71.67,119.88 90 top
R314  102  [R0805]  71.67,116.84 90 top
R315  100  [R0805]  61.51,124.2 0 top
R316  4701  [R0805]  75.48,125.98 270 top
R317  2702  [R0805]  79.55,125.98 90 top
R318  13  [R1206]  70.41,131.06 180 top
R319  2201  [R0805]  70.4,134.36 90 top
R320  1002  [R0805]  57.7,138.55 180 top
R321  1502  [R0805]  53,113.03 0 top
R322  2702  [R0805]  55.54,113.03 0 top
R323  2702  [R0805]  60.88,113.03 180 top
R324  1002  [R0805]  53.45,127.44 270 top
R325  104  [R0805]  52.05,129.66 270 top
R326  4701  [R0805]  58.72,133.73 0 top
R327  47  [V235/17_1MM]  102.15,128.01 90 bottom
R328  102  [R0805]  92.88,128.27 90 top
R329  47  [V235/17_1MM]  102.15,147.89 90 bottom
R330  104  [R0805]  56.75,129.66 270 top
R331  1502  [R0805]  49.7,121.66 180 top
R332  1002  [R0805]  47.03,123 180 top
R333  2201  [R0805]  47.03,127.57 0 top
R334  13  [R1206]  56.3,147.06 180 top
R335  104  [R0805]  78.53,131.95 270 top
R336  47  [V235/17_1MM]  96.56,128.52 90 bottom
R337  47  [V235/17_1MM]  96.56,148.4 270 bottom
R338  100  [R0805]  82.98,131.31 90 top
R339  (101)  [R0805]  82.98,134.49 90 top
R340  2702  [R0805]  71.42,140.08 270 top
R341  104  [R0805]  82.34,145.03 270 top
R342  (1000)  [R0805]  47.03,118.36 0 top
R343  (101)  [R0805]  37.51,134.49 270 top
R344  (1002)  [R0805]  69.77,148.97 0 top
R345  2702  [R0805]  78.78,146.81 270 top
R346  (1002)  [R0805]  37,158.24 90 top
R401  102  [R0805]  108.36,13.03 270 top
R402  13  [R1206]  122.71,13.92 180 top
R403  R_user  [R0805']  113.07,17.99 180 top
R404  R_user  [R0805']  108.87,13.79 270 bottom
R405  4701  [R0805]  167.93,8.59 270 top
R406  13  [R1206]  119.16,18.24 180 top
R407  1002  [R0805]  172.5,8.59 90 top
R408  1002  [R0805]  178.09,14.68 270 top
R409  104  [R0805]  195.23,47.7 90 top
R410  104  [R0805]  195.23,44.4 90 top
R411  104  [R0805]  195.23,41.1 90 top
R412  102  [R0805]  178.09,17.73 270 top
R413  102  [R0805]  167.67,14.68 90 top
R414  102  [R0805]  167.67,11.64 90 top
R415  100  [R0805]  157.51,19 0 top
R416  4701  [R0805]  171.48,20.78 270 top
R417  2702  [R0805]  175.55,20.78 90 top
R418  13  [R1206]  166.41,25.86 180 top
R419  2201  [R0805]  166.4,29.16 90 top
R420  1002  [R0805]  153.7,33.35 180 top
R421  1502  [R0805]  149,7.83 0 top
R422  2702  [R0805]  151.54,7.83 0 top
R423  2702  [R0805]  156.88,7.83 180 top
R424  1002  [R0805]  149.45,22.24 270 top
R425  104  [R0805]  148.05,24.46 270 top
R426  4701  [R0805]  154.72,28.53 0 top
R427  47  [V235/17_1MM]  198.15,22.81 90 bottom
R428  102  [R0805]  188.88,23.07 90 top
R429  47  [V235/17_1MM]  198.15,42.69 90 bottom
R430  104  [R0805]  152.75,24.46 270 top
R431  1502  [R0805]  145.7,16.46 180 top
R432  1002  [R0805]  143.03,17.8 180 top
R433  2201  [R0805]  143.03,22.37 0 top
R434  13  [R1206]  152.3,41.86 180 top
R435  104  [R0805]  174.53,26.75 270 top
R436  47  [V235/17_1MM]  192.56,23.32 90 bottom
R437  47  [V235/17_1MM]  192.56,43.2 270 bottom
R438  100  [R0805]  178.97,26.11 90 top
R439  (101)  [R0805]  178.97,29.29 90 top
R440  2702  [R0805]  167.42,34.88 270 top
R441  104  [R0805]  178.34,39.83 270 top
R442  (1000)  [R0805]  143.03,13.16 0 top
R443  (101)  [R0805]  133.51,29.29 270 top
R444  (1002)  [R0805]  165.77,43.77 0 top
R445  2702  [R0805]  174.78,41.61 270 top
R446  (1002)  [R0805]  133,53.04 90 top
R501  102  [R0805]  108.36,65.63 270 top
R502  13  [R1206]  122.71,66.52 180 top
R503  R_user  [R0805']  113.07,70.59 180 top
R504  R_user  [R0805']  108.87,66.4 270 bottom
R505  4701  [R0805]  167.93,61.19 270 top
R506  13  [R1206]  119.16,70.84 180 top
R507  1002  [R0805]  172.5,61.19 90 top
R508  1002  [R0805]  178.09,67.28 270 top
R509  104  [R0805]  195.23,100.3 90 top
R510  104  [R0805]  195.23,97 90 top
R511  104  [R0805]  195.23,93.7 90 top
R512  102  [R0805]  178.09,70.33 270 top
R513  102  [R0805]  167.67,67.28 90 top
R514  102  [R0805]  167.67,64.24 90 top
R515  100  [R0805]  157.51,71.6 0 top
R516  4701  [R0805]  171.48,73.38 270 top
R517  2702  [R0805]  175.55,73.38 90 top
R518  13  [R1206]  166.41,78.46 180 top
R519  2201  [R0805]  166.4,81.76 90 top
R520  1002  [R0805]  153.7,85.95 180 top
R521  1502  [R0805]  149,60.43 0 top
R522  2702  [R0805]  151.54,60.43 0 top
R523  2702  [R0805]  156.88,60.43 180 top
R524  1002  [R0805]  149.45,74.84 270 top
R525  104  [R0805]  148.05,77.06 270 top
R526  4701  [R0805]  154.72,81.13 0 top
R527  47  [V235/17_1MM]  198.15,75.41 90 bottom
R528  102  [R0805]  188.88,75.67 90 top
R529  47  [V235/17_1MM]  198.15,95.29 90 bottom
R530  104  [R0805]  152.75,77.06 270 top
R531  1502  [R0805]  145.7,69.06 180 top
R532  1002  [R0805]  143.03,70.4 180 top
R533  2201  [R0805]  143.03,74.97 0 top
R534  13  [R1206]  152.3,94.46 180 top
R535  104  [R0805]  174.53,79.35 270 top
R536  47  [V235/17_1MM]  192.56,75.92 90 bottom
R537  47  [V235/17_1MM]  192.56,95.8 270 bottom
R538  100  [R0805]  178.97,78.71 90 top
R539  (101)  [R0805]  178.97,81.89 90 top
R540  2702  [R0805]  167.42,87.48 270 top
R541  104  [R0805]  178.34,92.43 270 top
R542  (1000)  [R0805]  143.03,65.76 0 top
R543  (101)  [R0805]  133.51,81.89 270 top
R544  (1002)  [R0805]  165.77,96.37 0 top
R545  2702  [R0805]  174.78,94.21 270 top
R546  (1002)  [R0805]  133,105.64 90 top
R601  102  [R0805]  108.36,118.23 270 top
R602  13  [R1206]  122.71,119.12 180 top
R603  R_user  [R0805']  113.07,123.19 180 top
R604  R_user  [R0805']  108.87,119 270 bottom
R605  4701  [R0805]  167.93,113.79 270 top
R606  13  [R1206]  119.16,123.44 180 top
R607  1002  [R0805]  172.5,113.79 90 top
R608  1002  [R0805]  178.09,119.88 270 top
R609  104  [R0805]  195.23,152.9 90 top
R610  104  [R0805]  195.23,149.6 90 top
R611  104  [R0805]  195.23,146.3 90 top
R612  102  [R0805]  178.09,122.93 270 top
R613  102  [R0805]  167.67,119.88 90 top
R614  102  [R0805]  167.67,116.84 90 top
R615  100  [R0805]  157.51,124.2 0 top
R616  4701  [R0805]  171.48,125.98 270 top
R617  2702  [R0805]  175.55,125.98 90 top
R618  13  [R1206]  166.41,131.06 180 top
R619  2201  [R0805]  166.4,134.36 90 top
R620  1002  [R0805]  153.7,138.55 180 top
R621  1502  [R0805]  149,113.03 0 top
R622  2702  [R0805]  151.54,113.03 0 top
R623  2702  [R0805]  156.88,113.03 180 top
R624  1002  [R0805]  149.45,127.44 270 top
R625  104  [R0805]  148.05,129.66 270 top
R626  4701  [R0805]  154.72,133.73 0 top
R627  47  [V235/17_1MM]  198.15,128.01 90 bottom
R628  102  [R0805]  188.88,128.27 90 top
R629  47  [V235/17_1MM]  198.15,147.89 90 bottom
R630  104  [R0805]  152.75,129.66 270 top
R631  1502  [R0805]  145.7,121.66 180 top
R632  1002  [R0805]  143.03,123 180 top
R633  2201  [R0805]  143.03,127.57 0 top
R634  13  [R1206]  152.3,147.06 180 top
R635  104  [R0805]  174.53,131.95 270 top
R636  47  [V235/17_1MM]  192.56,128.52 90 bottom
R637  47  [V235/17_1MM]  192.56,148.4 270 bottom
R638  100  [R0805]  178.97,131.31 90 top
R639  (101)  [R0805]  178.97,134.49 90 top
R640  2702  [R0805]  167.42,140.08 270 top
R641  104  [R0805]  178.34,145.03 270 top
R642  (1000)  [R0805]  143.03,118.36 0 top
R643  (101)  [R0805]  133.51,134.49 270 top
R644  (1002)  [R0805]  165.77,148.97 0 top
R645  2702  [R0805]  174.78,146.81 270 top
R646  (1002)  [R0805]  133,158.24 90 top
SJ101  [SJ]  76.24,38.31 180 bottom
SJ201  [SJ]  76.24,90.91 180 bottom
SJ301  [SJ]  76.24,143.51 180 bottom
SJ401  [SJ]  172.24,38.31 180 bottom
SJ501  [SJ]  172.24,90.91 180 bottom
SJ601  [SJ]  172.24,143.51 180 bottom
START  TPSB2.0  [B2.0]  93.01,25.61 0 top
START201  TPSB2.0  [B2.0]  93.01,78.21 0 top
START301  TPSB2.0  [B2.0]  93.01,130.81 0 top
START401  TPSB2.0  [B2.0]  189.01,25.61 0 top
START501  TPSB2.0  [B2.0]  189.01,78.21 0 top
START601  TPSB2.0  [B2.0]  189.01,130.81 0 top
TP1  TPSB2.0  [B2.0]  30.27,11.26 0 top
TP2  TPSB2.0  [B2.0]  21.38,11.89 0 top
TP3  TPSB2.0  [B2.0]  27.41,16.34 0 top
TP4  TPSB2.0  [B2.0]  24.87,21.73 0 top
TP5  TPSB2.0  [B2.0]  27.41,27.13 0 top
TP6  TPSB2.0  [B2.0]  24.87,28.72 0 top
TP7  TPSB2.0  [B2.0]  27.73,34.43 0 top
TP8  TPSB2.0  [B2.0]  24.87,35.7 0 top
TP9  TPSB2.0  [B2.0]  30.27,39.51 0 top
TP10  TPSB2.0  [B2.0]  24.87,42.05 0 top
TP11  TPSB2.0  [B2.0]  30.59,46.5 0 top
TP12  TPSB2.0  [B2.0]  35.67,11.26 0 top
TP13  TPSB2.0  [B2.0]  29.51,49.74 0 top
TP14  TPSB2.0  [B2.0]  30.27,63.85 0 top
TP15  TPSB2.0  [B2.0]  21.38,64.49 0 top
TP16  TPSB2.0  [B2.0]  35.67,14.75 0 top
TP17  TPSB2.0  [B2.0]  35.67,18.24 0 top
TP18  TPSB2.0  [B2.0]  29.95,21.73 0 top
TP19  TPSB2.0  [B2.0]  41.06,24.27 0 top
TP20  TPSB2.0  [B2.0]  27.41,68.94 0 top
TP21  TPSB2.0  [B2.0]  30.27,28.72 0 top
TP22  TPSB2.0  [B2.0]  35.67,32.21 0 top
TP23  TPSB2.0  [B2.0]  35.67,36.34 0 top
TP24  TPSB1,27  [B1,27]  40.75,38.24 0 top
TP25  TPSB2.0  [B2.0]  30.33,42.18 0 top
TP26  TPSB2.0  [B2.0]  30.02,36.78 0 top
TP27  TPSB2.0  [B2.0]  24.87,74.33 0 top
TP28  TPSB2.0  [B2.0]  27.41,79.73 0 top
TP29  TPSB2.0  [B2.0]  24.87,81.32 0 top
TP30  TPSB2.0  [B2.0]  27.73,87.03 0 top
TP31  TPSB2.0  [B2.0]  24.87,88.3 0 top
TP32  TPSB2.0  [B2.0]  30.27,92.11 0 top
TP33  TPSB2.0  [B2.0]  24.87,94.65 0 top
TP34  TPSB2.0  [B2.0]  30.59,99.1 0 top
TP35  TPSB2.0  [B2.0]  35.67,67.35 0 top
TP36  TPSB2.0  [B2.0]  35.67,70.84 0 top
TP37  TPSB2.0  [B2.0]  29.95,74.33 0 top
TP38  TPSB2.0  [B2.0]  41.06,76.87 0 top
TP39  TPSB2.0  [B2.0]  30.27,81.32 0 top
TP40  TPSB2.0  [B2.0]  35.67,84.81 0 top
TP41  TPSB2.0  [B2.0]  35.67,88.94 0 top
TP42  TPSB1,27  [B1,27]  40.75,90.84 0 top
TP43  TPSB2.0  [B2.0]  30.33,94.78 0 top
TP44  TPSB2.0  [B2.0]  30.02,89.38 0 top
TP45  TPSB2.0  [B2.0]  35.67,63.85 0 top
TP46  TPSB2.0  [B2.0]  29.51,102.34 0 top
TP47  TPSB2.0  [B2.0]  30.27,116.45 0 top
TP48  TPSB2.0  [B2.0]  21.38,117.09 0 top
TP49  TPSB2.0  [B2.0]  27.41,121.53 0 top
TP50  TPSB2.0  [B2.0]  24.87,126.93 0 top
TP51  TPSB2.0  [B2.0]  27.41,132.33 0 top
TP52  TPSB2.0  [B2.0]  24.87,133.92 0 top
TP53  TPSB2.0  [B2.0]  27.73,139.63 0 top
TP54  TPSB2.0  [B2.0]  24.87,140.9 0 top
TP55  TPSB2.0  [B2.0]  30.27,144.71 0 top
TP56  TPSB2.0  [B2.0]  24.87,147.25 0 top
TP57  TPSB2.0  [B2.0]  30.59,151.7 0 top
TP58  TPSB2.0  [B2.0]  35.67,119.95 0 top
TP59  TPSB2.0  [B2.0]  35.67,123.44 0 top
TP60  TPSB2.0  [B2.0]  29.95,126.93 0 top
TP61  TPSB2.0  [B2.0]  41.06,129.47 0 top
TP62  TPSB2.0  [B2.0]  30.27,133.92 0 top
TP63  TPSB2.0  [B2.0]  35.67,137.41 0 top
TP64  TPSB2.0  [B2.0]  35.67,141.54 0 top
TP65  TPSB1,27  [B1,27]  40.75,143.44 0 top
TP66  TPSB2.0  [B2.0]  30.33,147.38 0 top
TP67  TPSB2.0  [B2.0]  30.02,141.98 0 top
TP68  TPSB2.0  [B2.0]  35.67,116.45 0 top
TP69  TPSB2.0  [B2.0]  29.51,154.94 0 top
TP139  TPSB2.0  [B2.0]  126.27,11.26 0 top
TP140  TPSB2.0  [B2.0]  117.38,11.89 0 top
TP141  TPSB2.0  [B2.0]  123.41,16.34 0 top
TP142  TPSB2.0  [B2.0]  120.87,21.73 0 top
TP143  TPSB2.0  [B2.0]  123.41,27.13 0 top
TP144  TPSB2.0  [B2.0]  120.87,28.72 0 top
TP145  TPSB2.0  [B2.0]  123.73,34.43 0 top
TP146  TPSB2.0  [B2.0]  120.87,35.7 0 top
TP147  TPSB2.0  [B2.0]  126.27,39.51 0 top
TP148  TPSB2.0  [B2.0]  120.87,42.05 0 top
TP149  TPSB2.0  [B2.0]  126.59,46.5 0 top
TP150  TPSB2.0  [B2.0]  131.67,14.75 0 top
TP151  TPSB2.0  [B2.0]  131.67,18.24 0 top
TP152  TPSB2.0  [B2.0]  125.95,21.73 0 top
TP153  TPSB2.0  [B2.0]  137.06,24.27 0 top
TP154  TPSB2.0  [B2.0]  126.27,28.72 0 top
TP155  TPSB2.0  [B2.0]  131.67,32.21 0 top
TP156  TPSB2.0  [B2.0]  131.67,36.34 0 top
TP157  TPSB1,27  [B1,27]  136.75,38.24 0 top
TP158  TPSB2.0  [B2.0]  126.33,42.18 0 top
TP159  TPSB2.0  [B2.0]  126.02,36.78 0 top
TP160  TPSB2.0  [B2.0]  131.67,11.26 0 top
TP161  TPSB2.0  [B2.0]  125.51,49.74 0 top
TP162  TPSB2.0  [B2.0]  126.27,63.85 0 top
TP163  TPSB2.0  [B2.0]  117.38,64.49 0 top
TP164  TPSB2.0  [B2.0]  123.41,68.94 0 top
TP165  TPSB2.0  [B2.0]  120.87,74.33 0 top
TP166  TPSB2.0  [B2.0]  123.41,79.73 0 top
TP167  TPSB2.0  [B2.0]  120.87,81.32 0 top
TP168  TPSB2.0  [B2.0]  123.73,87.03 0 top
TP169  TPSB2.0  [B2.0]  120.87,88.3 0 top
TP170  TPSB2.0  [B2.0]  126.27,92.11 0 top
TP171  TPSB2.0  [B2.0]  120.87,94.65 0 top
TP172  TPSB2.0  [B2.0]  126.59,99.1 0 top
TP173  TPSB2.0  [B2.0]  131.67,67.35 0 top
TP174  TPSB2.0  [B2.0]  131.67,70.84 0 top
TP175  TPSB2.0  [B2.0]  125.95,74.33 0 top
TP176  TPSB2.0  [B2.0]  137.06,76.87 0 top
TP177  TPSB2.0  [B2.0]  126.27,81.32 0 top
TP178  TPSB2.0  [B2.0]  131.67,84.81 0 top
TP179  TPSB2.0  [B2.0]  131.67,88.94 0 top
TP180  TPSB1,27  [B1,27]  136.75,90.84 0 top
TP181  TPSB2.0  [B2.0]  126.33,94.78 0 top
TP182  TPSB2.0  [B2.0]  126.02,89.38 0 top
TP183  TPSB2.0  [B2.0]  131.67,63.85 0 top
TP184  TPSB2.0  [B2.0]  125.51,102.34 0 top
TP185  TPSB2.0  [B2.0]  126.27,116.45 0 top
TP186  TPSB2.0  [B2.0]  117.38,117.09 0 top
TP187  TPSB2.0  [B2.0]  123.41,121.53 0 top
TP188  TPSB2.0  [B2.0]  120.87,126.93 0 top
TP189  TPSB2.0  [B2.0]  123.41,132.33 0 top
TP190  TPSB2.0  [B2.0]  120.87,133.92 0 top
TP191  TPSB2.0  [B2.0]  123.73,139.63 0 top
TP192  TPSB2.0  [B2.0]  120.87,140.9 0 top
TP193  TPSB2.0  [B2.0]  126.27,144.71 0 top
TP194  TPSB2.0  [B2.0]  120.87,147.25 0 top
TP195  TPSB2.0  [B2.0]  126.59,151.7 0 top
TP196  TPSB2.0  [B2.0]  131.67,119.95 0 top
TP197  TPSB2.0  [B2.0]  131.67,123.44 0 top
TP198  TPSB2.0  [B2.0]  125.95,126.93 0 top
TP199  TPSB2.0  [B2.0]  137.06,129.47 0 top
TP200  TPSB2.0  [B2.0]  126.27,133.92 0 top
TP201  TPSB2.0  [B2.0]  131.67,137.41 0 top
TP202  TPSB2.0  [B2.0]  131.67,141.54 0 top
TP203  TPSB1,27  [B1,27]  136.75,143.44 0 top
TP204  TPSB2.0  [B2.0]  126.33,147.38 0 top
TP205  TPSB2.0  [B2.0]  126.02,141.98 0 top
TP206  TPSB2.0  [B2.0]  131.67,116.45 0 top
TP207  TPSB2.0  [B2.0]  125.51,154.94 0 top
U$1  [CE_10.00]  81.83,6.94 0 bottom
U$2  [CE_10.00]  81.83,59.54 0 bottom
U$3  [CE_10.00]  81.83,112.14 0 bottom
U$7  [CE_10.00]  177.83,6.94 0 bottom
U$8  [CE_10.00]  177.83,59.54 0 bottom
U$9  [CE_10.00]  177.83,112.14 0 bottom
X101  [24-PIN_V2]  76.56,30.5 270 bottom
X102  22-23-2021  [22-23-2021]  16.93,13.16 90 bottom
X103  22-23-2051  [22-23-2051]  26.78,54.44 180 bottom
X201  [24-PIN_V2]  76.56,83.1 270 bottom
X202  22-23-2021  [22-23-2021]  16.93,65.76 90 bottom
X203  22-23-2051  [22-23-2051]  26.78,107.03 180 bottom
X301  [24-PIN_V2]  76.56,135.7 270 bottom
X302  22-23-2021  [22-23-2021]  16.93,118.36 90 bottom
X303  22-23-2051  [22-23-2051]  26.78,159.63 180 bottom
X401  [24-PIN_V2]  172.56,30.5 270 bottom
X402  22-23-2021  [22-23-2021]  112.94,13.16 90 bottom
X403  22-23-2051  [22-23-2051]  122.78,54.44 180 bottom
X501  [24-PIN_V2]  172.56,83.1 270 bottom
X502  22-23-2021  [22-23-2021]  112.94,65.76 90 bottom
X503  22-23-2051  [22-23-2051]  122.78,107.03 180 bottom
X601  [24-PIN_V2]  172.56,135.7 270 bottom
X602  22-23-2021  [22-23-2021]  112.94,118.36 90 bottom
X603  22-23-2051  [22-23-2051]  122.78,159.63 180 bottom

## Library data of the parts
1-6 13-18 = con WAGO BMW
6V 6V201 6V301 6V401 6V501 6V601 10V 10V201 10V301 10V401 10V501 10V601 START START201 START301 START401 START501 START601 TP1-TP69 TP139-TP207 = testpin_BMW
C101 C201 C301 C401 C501 C601 = Seeed-Capacitor-2016; MPN: CC0805KKX5R8BB475
C102-C106 C109 C110 C202-C206 C209 C210 C302-C306 C309 C310 C402-C406 C409 C410 C502-C506 C509 C510 C602-C606 C609 C610 = Seeed-Capacitor-2016; MPN: CC0805KRX7R9BB104
C107 C108 C207 C208 C307 C308 C407 C408 C507 C508 C607 C608 = Seeed-Capacitor-2016; MPN: GRM31CR60J107ME39L
D101 D104 D201 D204 D301 D304 D401 D404 D501 D504 D601 D604 = Suppressor_Diode_DO214AA
D102 D103 D105 D106 D111 D112 D202 D203 D205 D206 D211 D212 D302 D303 D305 D306 D311 D312 D402 D403 D405 D406 D411 D412 D502 D503 D505 D506 D511 D512 D602 D603 D605 D606 D611 D612 = Diode-do214ac; MPN: 1N4007
D107-D110 D207-D210 D307-D310 D407-D410 D507-D510 D607-D610 = Diode-do214ac
FID1 FID1B FID2 FID2B FID101-FID104 FID201-FID204 FID301-FID304 FID401-FID404 FID501-FID504 FID601-FID604 = Fiducial
IC101 IC109 IC201 IC209 IC301 IC309 IC401 IC409 IC501 IC509 IC601 IC609 = linear_BMW
IC102 IC104 IC202 IC204 IC302 IC304 IC402 IC404 IC502 IC504 IC602 IC604 = 78LXX
IC103 IC203 IC303 IC403 IC503 IC603 = v-reg
IC105 IC205 IC305 IC405 IC505 IC605 = 4028
IC106 IC206 IC306 IC406 IC506 IC606 = NUP4304_ESD_Diode_Array
IC107 IC207 IC307 IC407 IC507 IC607 = uln-udn
IC108 IC208 IC308 IC408 IC508 IC608 = LM339
IC110 IC210 IC310 IC410 IC510 IC610 = linear
IC111 IC211 IC311 IC411 IC511 IC611 = 45xx
JP101-JP105 JP201-JP205 JP301-JP305 JP401-JP405 JP501-JP505 JP601-JP605 = Switch Aliexpress 2
LED101-LED106 LED201-LED206 LED301-LED306 LED401-LED406 LED501-LED506 LED601-LED606 = led
Q101-Q105 Q201-Q205 Q301-Q305 Q401-Q405 Q501-Q505 Q601-Q605 = Transistor_SOT89
Q106 Q107 Q206 Q207 Q306 Q307 Q406 Q407 Q506 Q507 Q606 Q607 = Seeed-Transistor-2016; MPN: BSS138W-7-F
R101 R112-R114 R128 R201 R212-R214 R228 R301 R312-R314 R328 R401 R412-R414 R428 R501 R512-R514 R528 R601 R612-R614 R628 = Seeed-Resistor-2016; MPN: RC0805JR-071KL
R102 R106 R118 R134 R202 R206 R218 R234 R302 R306 R318 R334 R402 R406 R418 R434 R502 R506 R518 R534 R602 R606 R618 R634 = Seeed-Resistor-2016; MPN: RC1206JR-0713RL
R103 R104 R127 R129 R136 R137 R203 R204 R227 R229 R236 R237 R303 R304 R327 R329 R336 R337 R403 R404 R427 R429 R436 R437 R503 R504 R527 R529 R536 R537 R603 R604 R627 R629 R636 R637 = rcl
R105 R116 R117 R122 R123 R126 R145 R146 R205 R216 R217 R222 R223 R226 R245 R246 R305 R316 R317 R322 R323 R326 R345 R346 R405 R416 R417 R422 R423 R426 R445 R446 R505 R516 R517 R522 R523 R526 R545 R546 R605 R616 R617 R622 R623 R626 R645 R646 = Seeed-Resistor-2016; MPN: RC0805JR-074K7L
R107-R111 R120 R121 R124 R125 R130-R132 R135 R140 R141 R144 R207-R211 R220 R221 R224 R225 R230-R232 R235 R240 R241 R244 R307-R311 R320 R321 R324 R325 R330-R332 R335 R340 R341 R344 R407-R411 R420 R421 R424 R425 R430-R432 R435 R440 R441 R444 R507-R511 R520 R521 R524 R525 R530-R532 R535 R540 R541 R544 R607-R611 R620 R621 R624 R625 R630-R632 R635 R640 R641 R644 = Seeed-Resistor-2016; MPN: RC0805FR-0710KL
R115 R215 R315 R415 R515 R615 = Seeed-Resistor-2016; MPN: RC0805JR-07220RL
R119 R133 R138 R139 R219 R233 R238 R239 R319 R333 R338 R339 R419 R433 R438 R439 R519 R533 R538 R539 R619 R633 R638 R639 = Seeed-Resistor-2016; MPN: RC0805JR-072K2L
R142 R143 R242 R243 R342 R343 R442 R443 R542 R543 R642 R643 = Seeed-Resistor-2016; MPN: RC0805JR-07100RL
SJ101 SJ201 SJ301 SJ401 SJ501 SJ601 = solder-jumper
U$1-U$3 U$7-U$9 = logo
X101 X201 X301 X401 X501 X601 = con_BMW
X102 X202 X302 X402 X502 X602 = con_Molex_BMW; MF: MOLEX; MPN: 22-23-2021; OC_FARNELL: 1462926; OC_NEWARK: 25C3832
X103 X203 X303 X403 X503 X603 = con_Molex_BMW; MF: MOLEX; MPN: 22-23-2051; OC_FARNELL: 1462952; OC_NEWARK: 38C9178